# Altium PCB PCB1.PcbDoc
Units mm, origin at the board's own origin, x right, y up, seen from the top; angles counter-clockwise.
Board outline 70 x 25 mm, 2 copper layers (Top Layer, Bottom Layer); 58 components, 54 nets, 242 pads, 849 vias.
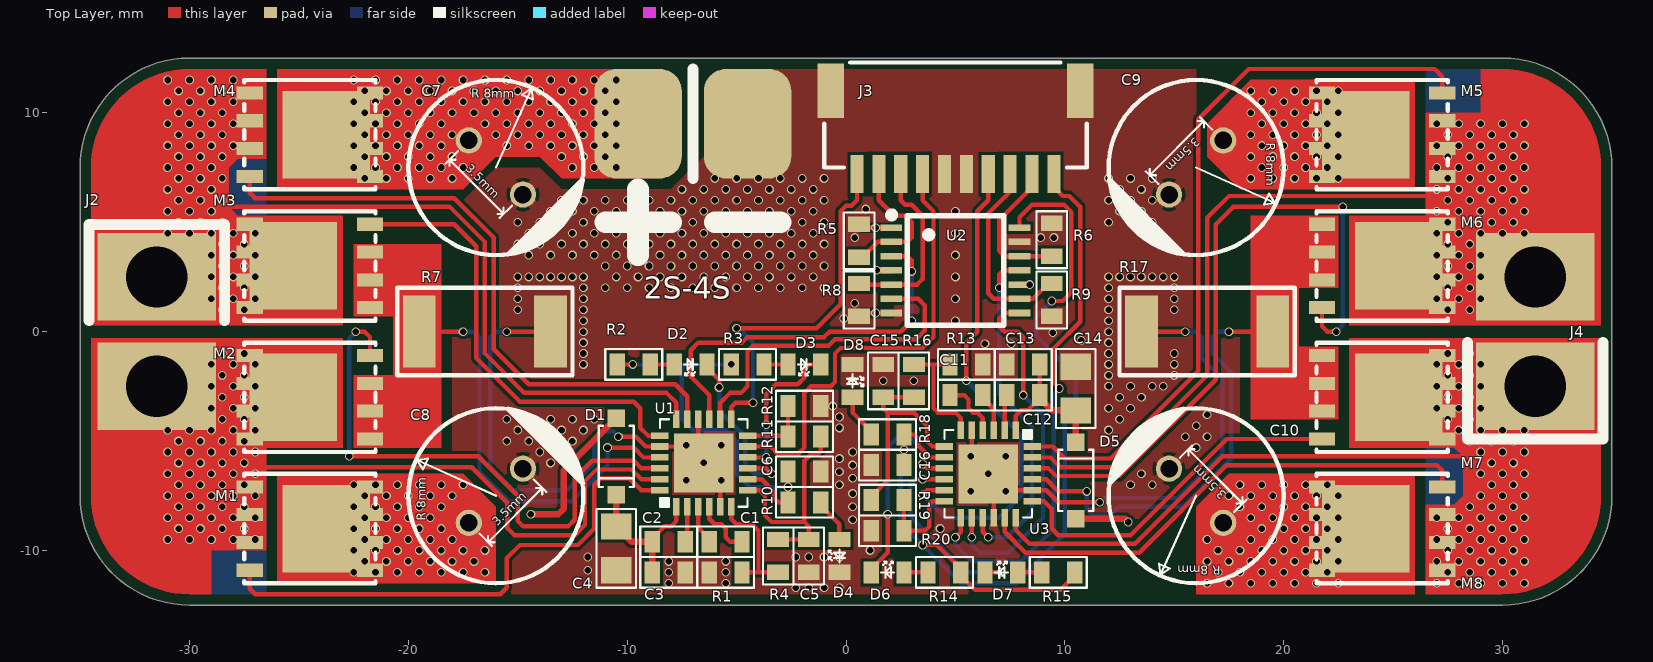
[diagram p0: Top Layer view]
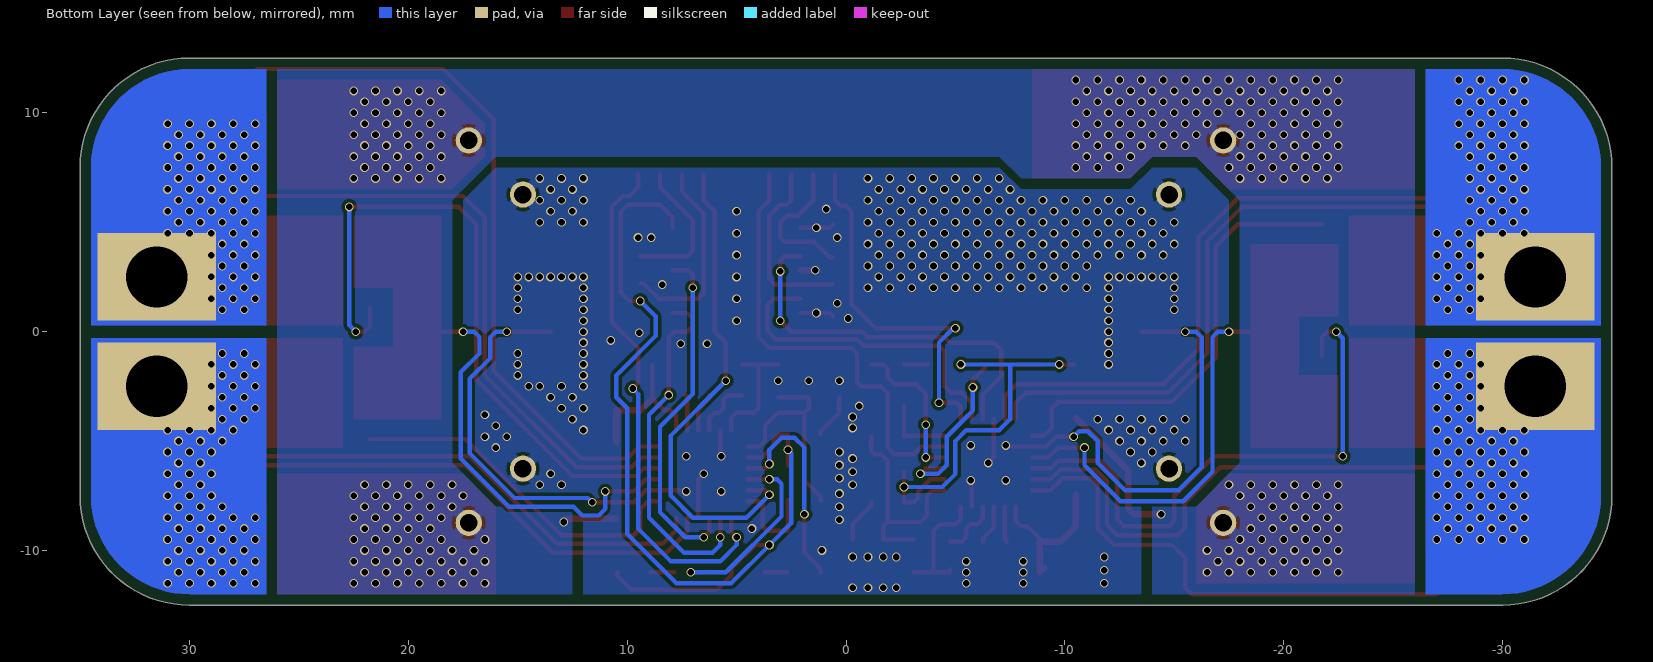
[diagram p1: Bottom Layer view, seen from below]
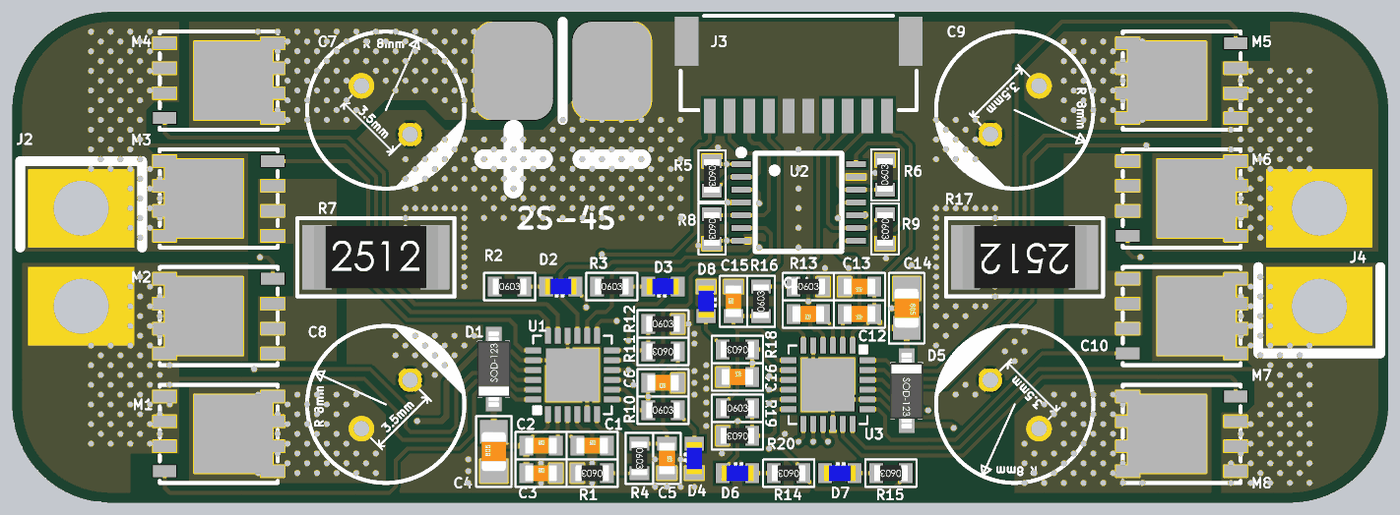
[diagram p2: 3D render of the assembled board from above, using the file's embedded part models]

## Layer stack, top to bottom
Top Solder: solder mask 0.0102, Solder Resist, Dk 3.5
Top Layer: signal copper 0.0356
Dielectric 1: dielectric 0.32, FR-4, Dk 4.8
Bottom Layer: signal copper 0.0356
Bottom Solder: solder mask 0.0102, Solder Resist, Dk 3.5

## Board outline
-30,-12.5 cw(c-30,-7.5) -35,-7.5 -35,7.5 cw(c-30,7.5) -30,12.5 30,12.5 cw(c30,7.5) 35,7.5 35,-7.5 cw(c30,-7.5) 30,-12.5

## Design rules (kind name [scope] priority, off if disabled: settings)
Clearance [All] p1: gap=0.15 ignorepadtopadclearanceinfootprint=FALSE
HoleSize [All] p1: absolutevalues=TRUE maxlimit=10 minlimit=0.025 maxpercent=80.000 minpercent=20.000
HoleToHoleClearance [All] p1: gap=0 allowstackedmicrovias=TRUE
MinimumSolderMaskSliver [All] p1: minsoldermaskwidth=0
PolygonConnect PolygonConnect_5 [All vs IsNamedPolygon('GND_TOP') Or IsNamedPolygon('GND_BOTTON') Or IsNamedPolygon('V_BAT_BOTTON')] p1: thpad.connectstyle=Relief thpad.reliefconductorwidth=0.5 thpad.reliefentries=4 thpad.polygonreliefangle="90 Angle" thpad.airgapwidth=0.15 smdpad.connectstyle=Direct smdpad.reliefconductorwidth=0.254 smdpad.reliefentries=4 smdpad.polygonreliefangle="90 Angle" smdpad.airgapwidth=0.254 via.connectstyle=Direct via.reliefconductorwidth=0.254 via.reliefentries=4 via.polygonreliefangle="90 Angle" via.airgapwidth=0.254
PolygonConnect PolygonConnect_4 [All vs IsNamedPolygon('GND_TOP')] p2: thpad.connectstyle=Relief thpad.reliefconductorwidth=0.5 thpad.reliefentries=4 thpad.polygonreliefangle="90 Angle" thpad.airgapwidth=0.15 smdpad.connectstyle=Relief smdpad.reliefconductorwidth=0.3 smdpad.reliefentries=4 smdpad.polygonreliefangle="90 Angle" smdpad.airgapwidth=0.15 via.connectstyle=Direct via.reliefconductorwidth=0.254 via.reliefentries=4 via.polygonreliefangle="90 Angle" via.airgapwidth=0.254
PolygonConnect PolygonConnect_3 [All vs IsNamedPolygon('GND_TOP')] p3: thpad.connectstyle=Relief thpad.reliefconductorwidth=0.5 thpad.reliefentries=4 thpad.polygonreliefangle="90 Angle" thpad.airgapwidth=0.15 smdpad.connectstyle=Relief smdpad.reliefconductorwidth=0.3 smdpad.reliefentries=4 smdpad.polygonreliefangle="90 Angle" smdpad.airgapwidth=0.15 via.connectstyle=NoConnect via.reliefconductorwidth=0.254 via.reliefentries=4 via.polygonreliefangle="90 Angle" via.airgapwidth=0.254
PolygonConnect PolygonConnect_2 [All vs IsNamedPolygon('GND_TOP') Or IsNamedPolygon('V_BAT_BOTTON')] p4: thpad.connectstyle=Relief thpad.reliefconductorwidth=0.5 thpad.reliefentries=4 thpad.polygonreliefangle="90 Angle" thpad.airgapwidth=0.15 smdpad.connectstyle=Direct smdpad.reliefconductorwidth=0.254 smdpad.reliefentries=4 smdpad.polygonreliefangle="90 Angle" smdpad.airgapwidth=0.254 via.connectstyle=Direct via.reliefconductorwidth=0.254 via.reliefentries=4 via.polygonreliefangle="90 Angle" via.airgapwidth=0.254
PolygonConnect PolygonConnect_1 [All vs IsNamedPolygon('V_BAT_BOTTON')] p5: thpad.connectstyle=Relief thpad.reliefconductorwidth=0.5 thpad.reliefentries=4 thpad.polygonreliefangle="90 Angle" thpad.airgapwidth=0.15 smdpad.connectstyle=Direct smdpad.reliefconductorwidth=0.254 smdpad.reliefentries=4 smdpad.polygonreliefangle="90 Angle" smdpad.airgapwidth=0.254 via.connectstyle=Direct via.reliefconductorwidth=0.254 via.reliefentries=4 via.polygonreliefangle="90 Angle" via.airgapwidth=0.254
PolygonConnect [All] p6: connectstyle=Relief reliefconductorwidth=0.254 reliefentries=4 polygonreliefangle="90 Angle" airgapwidth=0.254
RoutingVias [All] p1: holewidth=0.3 width=0.4 viastyle="Through Hole" minholewidth=0.3 minwidth=0.4 maxholewidth=0.3 maxwidth=0.4
SilkToSilkClearance [All] p1: silktosilkclearance=0
SilkToSolderMaskClearance [IsPad] p1: minsilkscreentomaskgap=0 clearancetoexposedcopper=TRUE
SolderMaskExpansion [IsVia] p1: expansion=0.102 istentingtop=TRUE
Width [All] p1: maxlimit=20 minlimit=0.1 preferedwidth=0.2
25 further rules are at their usual default settings.

## Components (designator, comment, footprint, x,y, rotation, side; value= is the part's Value field where it differs from the comment)
C1 "100nF" 0603C -5.5,-9.6 r0 top
C2 "1uF" 0603C -8.1,-9.6 r0 top
C3 "100nF" 0603C -8.1,-11 r0 top
C4 "10uF/25V" 0805C -10.5,-9.9 r90 top
C5 "1uF" 0603C -1.7,-10.25 r270 top
C6 "1uF" 0603C -1.9,-6.4 r180 top
C7 "CAP" CAP-8*11.5 -16,7.5 r315 top
C8 "CAP" CAP-8*11.5 -16,-7.5 r45 top
C9 "CAP" CAP-8*11.5 16,7.5 r225 top
C10 "CAP" CAP-8*11.5 16,-7.5 r135 top
C11 "100nF" 0603C 5.5,-2.9 r180 top
C12 "1uF" 0603C 8.1,-2.9 r180 top
C13 "100nF" 0603C 8.1,-1.5 r180 top
C14 "10uF/25V" 0805C 10.5,-2.6 r270 top
C15 "1uF" 0603C 1.7,-2.25 r90 top
C16 "1uF" 0603C 1.9,-6.1 r0 top
D1 "S4" SOD-123 -10.5,-5.7 r90 top
D2 "0603" 0603-LED -7.1,-1.5 r0 top
D3 "0603" 0603-LED -1.9,-1.5 r0 top
D4 "0603" 0603-LED -0.3,-10.25 r270 top
D5 "S4" SOD-123 10.5,-6.8 r270 top
D6 "0603" 0603-LED 1.9,-11 r180 top
D7 "0603" 0603-LED 7.1,-11 r180 top
D8 "0603" 0603-LED 0.3,-2.25 r90 top
J2 "XT30" AMASS_XT30_M -31.5,-2.5 r90 top
J3 "SH1.0_10P" SH1.0_10P 5,7.2 r180 top
J4 "XT30" AMASS_XT30_M 31.5,2.5 r270 top
M1 "MOS_IRFH7440" MOS_IRFH7440 -24.5,-9 r270 top
M2 "MOS_IRFH7440" MOS_IRFH7440 -24.5,-3 r90 top
M3 "MOS_IRFH7440" MOS_IRFH7440 -24.5,3 r90 top
M4 "MOS_IRFH7440" MOS_IRFH7440 -24.5,9 r270 top
M5 "MOS_IRFH7440" MOS_IRFH7440 24.5,9 r90 top
M6 "MOS_IRFH7440" MOS_IRFH7440 24.5,3 r270 top
M7 "MOS_IRFH7440" MOS_IRFH7440 24.5,-3 r270 top
M8 "MOS_IRFH7440" MOS_IRFH7440 24.5,-9 r90 top
R1 "0603" 0603R -5.5,-11 r180 top
R2 "10K" 0603R -9.7,-1.5 r0 top
R3 "10K" 0603R -4.5,-1.5 r0 top
R4 "0603" 0603R -3.1,-10.25 r270 top
R5 "10K" 0603R 0.6,4.15 r270 top
R6 "10K" 0603R 9.4,4.2 r90 top
R7 "10mR" 2512R -16.5,0 r0 top
R8 "10K" 0603R 0.6,1.45 r270 top
R9 "10K" 0603R 9.4,1.45 r270 top
R10 "10K" 0603R -1.9,-7.8 r0 top
R11 "0603" 0603R -1.9,-4.8 r180 top
R12 "0603" 0603R -1.9,-3.4 r0 top
R13 "0603" 0603R 5.5,-1.5 r0 top
R14 "10K" 0603R 4.5,-11 r180 top
R15 "10K" 0603R 9.7,-11 r180 top
R16 "0603" 0603R 3.1,-2.25 r90 top
R17 "10mR" 2512R 16.5,0 r180 top
R18 "10K" 0603R 1.9,-4.7 r180 top
R19 "0603" 0603R 1.9,-7.7 r0 top
R20 "0603" 0603R 1.9,-9.1 r180 top
U1 "DRV8701" DRV8701 -6.5,-6 r90 top
U2 "SN74HC125" TSSOP-14_L5.0-W4.4-P0.65-LS6.5-BL 5,2.8 r270 top
U3 "DRV8701" DRV8701 6.5,-6.5 r270 top

## Footprints (in the part's own frame and the unit in brackets; to place one, negate y for a bottom-side part, rotate by r counter-clockwise, add the part's x,y. Pads: shape width x height; smd on the part's side, far side on the other; paste and mask are expansions set on the pad)
0603-LED [mm]
  rect 0.7x1 smd mask+0.05: 1(-0.75,0) 2(0.75,0)
  silkscreen extent -0.3,-0.5 0.3,0.25, body extent -0.81,-0.4 0.81,0.4, height 1.1
0603C [mm]
  rect 0.7x1 smd mask+0.05: 1(-0.75,0) 2(0.75,0)
  silkscreen extent -1.3,-0.7 1.3,0.7, body extent -0.8,-0.4 0.8,0.4, height 0.3
0603R [mm]
  rect 0.7x1 smd mask+0.05: 1(-0.75,0) 2(0.75,0)
  silkscreen extent -1.3,-0.7 1.3,0.7, body extent -0.85,-0.4 0.85,0.4, height 0.56
0805C [mm]
  rect 1.2x1.4 smd mask+0.051: 1(-1,0) 2(1,0)
  silkscreen extent -1.8,-0.9 1.8,0.9, body extent -1,-0.63 1,0.63, height 0.78
2512R [mm]
  rect 1.5x3.3 smd: 1(-3,0) 2(3,0)
  silkscreen extent -4,-2 4,2, body extent -3.16,-1.6 3.16,1.6, height 0.62
AMASS_XT30_M [mm]
  rect 4x5.4 hole 2.8: 1(5,0) 2(0,0)
  silkscreen extent 3,-3.1 7.4,3.1
CAP-8*11.5 [mm]
  round 1.2 hole 0.8 paste+0 mask+0.051: 1(-1.75,0) 2(1.75,0)
  silkscreen extent -4,-4 4.1,4
DRV8701 [mm]
  rect 0.8x0.3 smd mask+0.05: 1(-2,1.25) 2(-2,0.75) 3(-2,0.25) 4(-2,-0.25) 5(-2,-0.75) 6(-2,-1.25) 13(2,-1.25) 14(2,-0.75) 15(2,-0.25) 16(2,0.25) 17(2,0.75) 18(2,1.25)
  rect 0.3x0.8 smd mask+0.05: 7(-1.25,-2) 8(-0.75,-2) 9(-0.25,-2) 10(0.25,-2) 11(0.75,-2) 12(1.25,-2) 19(1.25,2) 20(0.75,2) 21(0.25,2) 22(-0.25,2) 23(-0.75,2) 24(-1.25,2)
  rect 2.7x2.7 smd mask+0.05: 25(0,0)
  silkscreen extent -2,-2 2,2
MOS_IRFH7440 [mm]
  rect 0.6x1.2 smd paste+0 mask+0.051: D(-1.905,2.75) D(-0.635,2.75) D(0.635,2.75) D(1.905,2.75) G(1.905,-2.75) S(-1.905,-2.75) S(-0.635,-2.75) S(0.635,-2.75)
  rect 4x4 smd paste+0 mask+0.051: D(0,0.75)
  silkscreen extent -2.5,-3 2.5,3
SH1.0_10P [mm]
  rect 0.6x1.75 smd: 1(-4.5,0) 2(-3.5,0) 3(-2.497,0) 4(-1.5,0) 5(-0.5,0) 6(0.5,0) 7(1.5,0) 8(2.5,0) 9(3.5,0) 10(4.5,0)
  rect 1.2x2.5 smd: 11(5.7,-3.81) 12(-5.7,-3.81)
  silkscreen extent -6,-5.1 6,-0.3
SOD-123 [mm] "塑封二极管（电磁板的）"
  rect 0.8x0.8 smd: A(1.75,0) K(-1.75,0)
  silkscreen extent -1.4,-0.8 1.4,0.8, body extent -1.93,-0.85 1.92,0.85, height 1.43
TSSOP-14_L5.0-W4.4-P0.65-LS6.5-BL [mil]
  rect 12x39 smd mask+1.97: 1(-76.8,-115.2) 2(-51.2,-115.2) 3(-25.6,-115.2) 4(0,-115.2) 5(25.6,-115.2) 6(51.2,-115.2) 7(76.8,-115.2) 8(76.8,115.2) 9(51.2,115.2) 10(25.6,115.2) 11(0,115.2) 12(-25.6,115.2) 13(-51.2,115.2) 14(-76.8,115.2)
  silkscreen extent -106,-121 98,87

## Part data
C1 C2 C3 C5 C6 C11 C12 C13 C15 C16: library part 0603-C
C4 C14: library part 0805-C
C7 C8 C9 C10: "插件电解电容"
D1 D5: library part DIODE-SOD123, "二极管"
D2 D3 D4 D6 D7 D8: library part 0603-LED, Designer=www.dratk.com
J2 J4: library part AMASS_XT30_M, "XT30_M"
M1 M2 M3 M4 M5 M6 M7 M8: "NMOS"
R1 R2 R3 R4 R5 R6 R8 R9 R10 R11 R12 R13 R14 R15 R16 R18 R19 R20: library part 0603-R
R7 R17: library part 2512-R
U2: "TI, 2-6V"

## Free pads (board coordinates)
  rrect50% 4x5 smd paste+0 mask+0.051: 0(-9.5,9.5) 0(-4.5,9.5)

## Via types
v1: diameter 0.4, hole 0.3, Top Layer to Bottom Layer, 849 vias

## Nets (pads, with @x,y where several pads share a name; then routed paths per layer and width w, separated by ;. In a path a pad name is that pad's centre, name@x,y a point inside that pad or via, vN(x,y) a via of type N, cw(c..) or ccw(c..) an arc to the next point about the centre after c; other vN are vias at no path point)
DVDD: C16.2 R14.1 R15.1 R18.1 U2.14 U3.8 | length 45.1
  Top Layer w0.2: C16.2 v1(2.65,-5.4) R18.1 3.1,-4.7 3.3,-4.9 3.3,-5.2 3.85,-5.75 U3.8 ; v1(3.5,-9.75) 4.15,-9.75 5.25,-10.85 R14.1 5.25,-11.15 5.9,-11.8 9.8,-11.8 10.45,-11.15 R15.1 ; U2.14 7.926,5.226 8.5,5.8 9.962,5.8 10.3,5.462 10.3,1.8 9.9,1.4 v1(9.4,1.4)
  Bottom Layer w0.2: v1(2.65,-5.4) 2.5,-5.55 2.5,-8.75 v1(3.5,-9.75) 5.25,-11.5 7.75,-11.5 10,-9.25 10,-3.5 10.5,-3 10.5,-2 8.7,-0.2 8.7,0.7 v1(9.4,1.4)
EN/IN2: U1.14 U2.6 | length 15.2
  Top Layer w0.2: U1.14 -5.75,-3.25 -5.3,-2.8 -4.8,-2.8 -4.5,-2.5 -4.5,-0.9 -4.25,-0.65 -0.8,-0.65 -0.5,-0.35 3.2,-0.35 3.6,0.05 3.6,1.2 3.3,1.5 2.8,1.5 U2.6
GND: C3.2 C4.1 C5.2 C6.1 C7.2 C8.2 C9.2 C10.2 C13.2 C14.1 C15.2 C16.1 D4.2 D8.2 J3.5 J3.6 J3.11 J3.12 pad.0@-4.5,9.5 R1.2 R5.1 R6.2 R7.2 R8.2 R9.2 R12.2 R13.2 R17.2 R20.2 U1.5 U1.16 U1.20 U1.25 U2.1 U2.4 U2.7 U2.10 U2.13 U3.5 U3.16 U3.20 U3.25 | length 50.2
  Top Layer w0.2: v1(-15.5,0) -13.502,0 -13.501,0.001 R7.2 ; v1(-10.4,-4.8) -9.6,-4.8 -9.15,-5.25 U1.20 -7.35,-5.25 v1(-7.3,-5.2) ; U1.16 -6.75,-5.75 v1(-6.5,-6) ; U1.5 -5.75,-6.85 v1(-5.7,-6.8) ; R8.2 0.75,0.85 v1(1.35,0.85) ; R5.1 0.75,4.75 v1(1.35,4.75) ; v1@1.351,0.849 U2.7 ; v1(1.35,4.75) U2.1 ; v1(5.7,-5.7) 5.75,-5.65 U3.5 ; v1(6.5,-6.5) 6.75,-6.75 U3.16 ; v1(7.3,-7.3) 7.35,-7.25 U3.20 9.15,-7.25 9.7,-7.8 v1(11.6,-7.8) ; R17.2 v1(15.5,0)
  Top Layer w0.3: v1(1.4,2.8) U2.4
  Bottom Layer w0.2: v1(-15.5,0) -16,0 -16.25,-0.25 -16.25,-6.2 -15.2,-7.25 -12.75,-7.25 -11.5,-6 -11.5,-5 -11.05,-4.55 -10.65,-4.55 v1(-10.4,-4.8) ; v1(11.6,-7.8) 11.8,-7.6 15.15,-7.6 17.2,-5.55 17.2,-2.15 16.25,-1.2 16.25,-0.25 16,0 v1(15.5,0)
  other v1: -2.3,-11.7 -1.7,-11.7 -1,-11.7 -0.3,-11.7 -11.8,-11.5 -8.1,-11.5 -5.5,-11.5 -8.1,-11 -5.5,-11 -11.8,-10.9 -8.1,-10.5 -5.5,-10.5 -11.8,-10.3 -2.3,-10.3 -1.7,-10.3 -1,-10.3 -0.3,-10.3 1.1,-10 4.3,-9 0.3,-8.6 0.3,-8 0.3,-7.4 5.7,-7.3 -0.3,-7 13,-7 14,-7 -7.3,-6.8 0.3,-6.7 13.5,-6.5 -0.3,-6.4 0.3,-6.1 -13.5,-6 -0.3,-5.8 7.3,-5.7 -14,-5.5 -13,-5.5 0.3,-5.5 16,-5.3 -5.7,-5.2 -15.5,-5 -14.5,-5 -13.5,-5 -12.5,-5 15.5,-4.8 16.5,-4.8 -15,-4.5 -14,-4.5 -13,-4.5 -12,-4.5 12,-4.5 -0.3,-4.4 16,-4.3 -15.5,-4 -14.5,-4 -13.5,-4 -12.5,-4 -11.5,-4 12.5,-4 -0.3,-3.9 16.5,-3.8 12,-3.5 13,-3.5 -0.6,-3.4 12.5,-3 13.5,-3 12,-2.5 13,-2.5 14,-2.5 14.5,-2.5 0.3,-2.25 1.7,-2.25 3.1,-2.25 12,-2 15,-2 -12,-1.5 12,-1.5 15,-1.5 -12,-1 12,-1 15,-1 6.35,-0.55 7.55,-0.55 -12,-0.5 12,-0.5 10.75,-0.4 9.45,-0.05 -12,0 12,0 -12,0.5 5,0.5 12,0.5 -0.1,0.6 -15,1 -12,1 12,1 15,1 0.4,1.3 -15,1.5 -12,1.5 5,1.5 12,1.5 15,1.5 -15,2 -12,2 -11,2 -10,2 -9,2 -8,2 -7,2 -6,2 -5,2 -4,2 -3,2 -2,2 -1,2 12,2 15,2 8.4,2.15 -15,2.5 -14.5,2.5 -14,2.5 -13.5,2.5 -13,2.5 -12.5,2.5 -12,2.5 -10.5,2.5 -9.5,2.5 -8.5,2.5 -7.5,2.5 -6.5,2.5 -5.5,2.5 -4.5,2.5 -3.5,2.5 -2.5,2.5 -1.5,2.5 5,2.5 12,2.5 12.5,2.5 13,2.5 13.5,2.5 14,2.5 14.5,2.5 15,2.5 -11,3 -10,3 -9,3 -8,3 -7,3 -6,3 -5,3 -4,3 -3,3 -2,3 -1,3 -14.5,3.5 -13.5,3.5 -12.5,3.5 -11.5,3.5 -10.5,3.5 -9.5,3.5 -8.5,3.5 -7.5,3.5 -6.5,3.5 -5.5,3.5 -4.5,3.5 -3.5,3.5 -2.5,3.5 -1.5,3.5 5,3.5 -15,4 -14,4 -13,4 -12,4 -11,4 -10,4 -9,4 -8,4 -7,4 -6,4 -5,4 -4,4 -3,4 -2,4 -1,4 0.4,4.3 8.9,4.3 9.5,4.3 -14.5,4.5 -13.5,4.5 -12.5,4.5 -11.5,4.5 -10.5,4.5 -9.5,4.5 -8.5,4.5 -7.5,4.5 -6.5,4.5 -5.5,4.5 -4.5,4.5 -3.5,4.5 -2.5,4.5 -1.5,4.5 5,4.5 -15,5 -14,5 -13,5 -12,5 -11,5 -10,5 -9,5 -8,5 -7,5 -6,5 -5,5 -4,5 -3,5 -2,5 -1,5 12,5 13,5 14,5 -13.5,5.5 -12.5,5.5 -11.5,5.5 -10.5,5.5 -9.5,5.5 -8.5,5.5 -7.5,5.5 -6.5,5.5 -5.5,5.5 -4.5,5.5 -3.5,5.5 -2.5,5.5 -1.5,5.5 5,5.5 12.5,5.5 13.5,5.5 0.9,5.6 -13,6 -12,6 -11,6 -10,6 -9,6 -8,6 -7,6 -6,6 -5,6 -4,6 -3,6 -2,6 -1,6 12,6 13,6 14,6 -7.5,6.5 -6.5,6.5 -5.5,6.5 -4.5,6.5 -3.5,6.5 -2.5,6.5 -1.5,6.5 12.5,6.5 13.5,6.5 -7,7 -6,7 -5,7 -4,7 -3,7 -2,7 -1,7 12,7 13,7 14,7
M2_EN/IN2: U2.8 U3.14 | length 16.6
  Top Layer w0.2: v1(5.75,-9.4) U3.14 ; U2.8 7.249,0.849 7,0.6 7,0.25 7.25,0 7.85,0 8.1,-0.25 v1(8.1,-2.9)
  Bottom Layer w0.2: v1(5.75,-9.4) 5.75,-9.75 6.1,-10.1 7.4,-10.1 9,-8.5 9,-3.8 v1(8.1,-2.9)
M2_nFAULT: D6.2 U3.9 | length 9.8
  Top Layer w0.2: D6.2 1.15,-10.85 1.9,-10.1 v1(1.9,-8.35) ; v1(3.5,-6.05) 3.7,-6.25 U3.9
  Bottom Layer w0.2: v1(1.9,-8.35) 1.9,-5.3 2.35,-4.85 2.95,-4.85 3.5,-5.4 v1(3.5,-6.05)
M2_nSLEEP: J3.1 U3.13 | length 24.4
  Top Layer w0.2: v1(5,-9.4) 5.25,-9.15 U3.13 ; J3.1 9.5,6.6 9.9,6.2 10.2,6.2 10.7,5.7 10.7,0.45 9.5,-0.75 9.5,-2.35 v1(9.75,-2.6)
  Bottom Layer w0.2: v1(5,-9.4) 5,-9.75 5.75,-10.5 8,-10.5 9.5,-9 9.5,-2.85 v1(9.75,-2.6)
M2_PH/IN1: U2.11 U3.15 | length 16
  Top Layer w0.2: U3.15 6.25,-9.15 v1(6.5,-9.4) ; v1(7,2) 7,2.6 7.2,2.8 U2.11
  Bottom Layer w0.2: v1(6.5,-9.4) 7.35,-9.4 8.5,-8.25 8.5,-4.35 7,-2.85 v1(7,2)
M2_SNSOUT: D7.2 U3.10 | length 9.1
  Top Layer w0.2: v1(3.5,-6.75) U3.10 ; D7.2 v1(7.1,-11)
  Bottom Layer w0.2: v1(3.5,-6.75) 3.15,-6.75 2.95,-6.95 2.95,-8.45 5.5,-11 v1(7.1,-11)
M2_SO: J3.4 U3.11 | length 22.6
  Top Layer w0.2: v1(3.5,-7.45) 3.7,-7.25 U3.11 ; v1(5.5,-2.25) 5.5,-0.5 6,0 6,5.5 6.5,6 J3.4
  Bottom Layer w0.2: v1(3.5,-7.45) 4.55,-8.5 7,-8.5 8,-7.5 8,-4.75 v1(5.5,-2.25)
NetC1_1: C1.1 U1.3 | length 1.8
  Top Layer w0.2: U1.3 -6.75,-8.95 -6.25,-9.45 C1.1
NetC1_2: C1.2 U1.4 | length 2.7
  Top Layer w0.2: U1.4 -6.25,-8.55 -6,-8.8 -5.7,-8.8 -5.5,-9 -5.5,-9.4 -5.3,-9.6 C1.2
NetC2_1: C2.1 C3.1 C4.2 D1.K U1.1 | length 7.3
  Top Layer w0.2: C2.1 -8.85,-9.45 -8.3,-8.9 -8,-8.9 -7.75,-8.65 U1.1
  Top Layer w0.3: D1.K C4.2 -9.8,-9.6 C2.1 C3.1 C3.1@-9.05,-10.8
NetC2_2: C2.2 U1.2 | length 1.6
  Top Layer w0.2: C2.2 -7.25,-9.5 U1.2
NetC5_1: C5.1 R4.1 R11.1 U1.7 | length 10.4
  Top Layer w0.2: U1.7 -3.95,-7.25 -3.7,-7.5 -3.7,-8.4 -3.4,-8.7 -1.9,-8.7 ; R4.1 C5.1 -1.7,-8.9 -1.9,-8.7 ; R11.1 -1.15,-5.15 -1.15,-5.45 -1.3,-5.6 -1.6,-5.6 -1.9,-5.9 -1.9,-8.7
NetC6_2: C6.2 R2.1 R3.1 R10.1 U1.8 | length 18.7
  Top Layer w0.2: R2.1 v1(-9.75,-1.5) ; v1(-5.25,-1.5) R3.1@-5.25,-1.35 ; U1.8 -3.85,-6.75 -3.3,-7.3 -3.3,-7.6 -3.1,-7.8 R10.1 v1(-2.65,-7.1) C6.2
  Bottom Layer w0.2: v1(-9.75,-1.5) -7.5,-1.5 ; v1(-5.25,-1.5) -7.5,-1.5 ; v1(-2.65,-7.1) -4.4,-7.1 -5,-6.5 -5,-5 -5.5,-4.5 -7,-4.5 -7.5,-4 -7.5,-1.5
NetC11_1: C11.1 U3.3 | length 1.8
  Top Layer w0.2: C11.1 6.25,-3.05 6.75,-3.55 U3.3
NetC11_2: C11.2 U3.4 | length 2.7
  Top Layer w0.2: C11.2 5.4,-2.9 5.6,-3.1 5.6,-3.5 5.8,-3.7 6,-3.7 6.25,-3.95 U3.4
NetC12_1: C12.1 C13.1 C14.2 D5.K U3.1 | length 7.1
  Top Layer w0.2: U3.1 7.75,-3.85 8,-3.6 8.3,-3.6 C12.1@8.85,-3.05 ; C12.1 C12.1@8.85,-3.05 ; C13.1 C12.1@8.85,-3.05
  Top Layer w0.3: C12.1@8.85,-3.05 9.4,-3.6 C14.2 D5.K
NetC12_2: C12.2 U3.2 | length 1.6
  Top Layer w0.2: U3.2 7.25,-3 C12.2
NetC15_1: C15.1 R16.1 R19.1 U3.7 | length 10.1
  Top Layer w0.2: R19.1 1.15,-7.55 1.9,-6.8 1.9,-3.7 ; R16.1 C15.1 1.7,-3.5 1.9,-3.7 ; U3.7 3.95,-5.25 3.7,-5 3.7,-4.3 3.1,-3.7 1.9,-3.7
NetD2_1: D2.1 R2.2 | length 1.1
  Top Layer w0.2: R2.2 D2.1
NetD3_1: D3.1 R3.2 | length 1.1
  Top Layer w0.2: R3.2 D3.1
NetD4_1: D4.1 R10.2 | length 2.1
  Top Layer w0.2: R10.2 -1.15,-7.95 -0.3,-8.8 D4.1
NetD6_1: D6.1 R14.2 | length 1.1
  Top Layer w0.2: D6.1 R14.2
NetD7_1: D7.1 R15.2 | length 1.1
  Top Layer w0.2: D7.1 R15.2
NetD8_1: D8.1 R18.2 | length 2.1
  Top Layer w0.2: D8.1 0.3,-3.7 1.15,-4.55 R18.2
NetJ2_1: J2.1 M3.D M4.S U1.18 | length 28.2
  Top Layer w0.2: -28.5,5.7 -18.1,5.7 -16.5,4.1 -16.5,-1 -14.7,-2.8 -8.2,-2.8 -7.75,-3.25 U1.18
  other v1: -28.5,1 -27.5,1 -29,1.5 -28,1.5 -27,1.5 -28.5,2 -27.5,2 -29,2.5 -28,2.5 -27,2.5 -28.5,3 -27.5,3 -29,3.5 -28,3.5 -27,3.5 -28.5,4 -27.5,4 -31,4.5 -30,4.5 -29,4.5 -28,4.5 -27,4.5 -30.5,5 -29.5,5 -28.5,5 -31,5.5 -30,5.5 -29,5.5 -30.5,6 -29.5,6 -28.5,6 -31,6.5 -30,6.5 -29,6.5 -30.5,7 -29.5,7 -28.5,7 -31,7.5 -30,7.5 -29,7.5 -30.5,8 -29.5,8 -28.5,8 -31,8.5 -30,8.5 -29,8.5 -28,8.5 -30.5,9 -29.5,9 -28.5,9 -31,9.5 -30,9.5 -29,9.5 -28,9.5 -30.5,10 -29.5,10 -28.5,10 -31,10.5 -30,10.5 -29,10.5 -28,10.5 -30.5,11 -29.5,11 -28.5,11 -31,11.5 -30,11.5 -29,11.5 -28,11.5
NetJ2_2: J2.2 M1.S M2.D U1.23 | length 22.8
  Top Layer w0.2: -26.7,-6.2 -17.1,-6.2 -15.475,-7.825 -15.475,-8.975 -15.15,-9.3 -12.4,-9.3 -11.925,-8.825 -11.925,-6.825 -11.4,-6.3 -9.8,-6.3 -9.35,-6.75 U1.23
  other v1: -31,-9.5 -30,-9.5 -29,-9.5 -28,-9.5 -27,-9.5 -30.5,-9 -29.5,-9 -28.5,-9 -27.5,-9 -31,-8.5 -30,-8.5 -29,-8.5 -28,-8.5 -27,-8.5 -30.5,-8 -29.5,-8 -28.5,-8 -27.5,-8 -31,-7.5 -30,-7.5 -29,-7.5 -28,-7.5 -27,-7.5 -30.5,-7 -29.5,-7 -28.5,-7 -27.5,-7 -31,-6.5 -30,-6.5 -29,-6.5 -28,-6.5 -27,-6.5 -30.5,-6 -29.5,-6 -28.5,-6 -27.5,-6 -31,-5.5 -30,-5.5 -29,-5.5 -28,-5.5 -27,-5.5 -30.5,-5 -29.5,-5 -28.5,-5 -27.5,-5 -31,-4.5 -30,-4.5 -29,-4.5 -28,-4.5 -27,-4.5 -28.5,-4 -27.5,-4 -29,-3.5 -28,-3.5 -27,-3.5 -28.5,-3 -27.5,-3 -29,-2.5 -28,-2.5 -27,-2.5 -28.5,-2 -27.5,-2 -29,-1.5 -28,-1.5 -27,-1.5 -28.5,-1 -27.5,-1
NetJ4_1: J4.1 M7.D M8.S U3.18 | length 23.1
  Top Layer w0.2: U3.18 7.75,-9.05 8.4,-9.7 13.2,-9.7 17.2,-5.7 28.375,-5.7
  other v1: 27,-11.5 28,-11.5 29,-11.5 30,-11.5 31,-11.5 27.5,-11 28.5,-11 29.5,-11 30.5,-11 27,-10.5 28,-10.5 29,-10.5 30,-10.5 31,-10.5 27.5,-10 28.5,-10 29.5,-10 30.5,-10 27,-9.5 28,-9.5 29,-9.5 30,-9.5 31,-9.5 27.5,-9 28.5,-9 29.5,-9 30.5,-9 27,-8.5 28,-8.5 29,-8.5 30,-8.5 31,-8.5 28.5,-8 29.5,-8 30.5,-8 29,-7.5 30,-7.5 31,-7.5 29.5,-7 30.5,-7 29,-6.5 30,-6.5 31,-6.5 29.5,-6 30.5,-6 29,-5.5 30,-5.5 31,-5.5 28.5,-5 29.5,-5 30.5,-5 28,-4.5 29,-4.5 30,-4.5 31,-4.5 27.5,-4 28.5,-4 27,-3.5 28,-3.5 29,-3.5 27.5,-3 28.5,-3 27,-2.5 28,-2.5 29,-2.5 27.5,-2 28.5,-2 27,-1.5 28,-1.5 29,-1.5 27.5,-1 28.5,-1
NetJ4_2: J4.2 M5.S M6.D U3.23 | length 27.7
  Top Layer w0.2: U3.23 9.35,-5.75 9.8,-6.2 12.3,-6.2 16.5,-2 16.5,0.866 16.5,5.2 17.5,6.2 26.635,6.2
  other v1: 27.5,1 28.5,1 27,1.5 28,1.5 29,1.5 27.5,2 28.5,2 27,2.5 28,2.5 29,2.5 27.5,3 28.5,3 27,3.5 28,3.5 29,3.5 27.5,4 28.5,4 27,4.5 28,4.5 29,4.5 30,4.5 31,4.5 27.5,5 28.5,5 29.5,5 30.5,5 27,5.5 28,5.5 29,5.5 30,5.5 31,5.5 27.5,6 28.5,6 29.5,6 30.5,6 27,6.5 28,6.5 29,6.5 30,6.5 31,6.5 27.5,7 28.5,7 29.5,7 30.5,7 27,7.5 28,7.5 29,7.5 30,7.5 31,7.5 27.5,8 28.5,8 29.5,8 30.5,8 27,8.5 28,8.5 29,8.5 30,8.5 31,8.5 27.5,9 28.5,9 29.5,9 30.5,9 27,9.5 28,9.5 29,9.5 30,9.5 31,9.5
NetM1_G: M1.G U1.24 | length 24.1
  Top Layer w0.2: M1.G -27.25,-11.75 -27,-12 -15.8,-12 -15.5,-11.7 -15.5,-10.35 -14.9,-9.75 -12.25,-9.75 -11.5,-9 -11.5,-7 -11.2,-6.7 -9.9,-6.7 -9.35,-7.25 U1.24
NetM2_G: M2.G U1.22 | length 26.1
  Top Layer w0.2: v1(-22.7,-5.7) -16.8,-5.7 -15,-7.5 -15,-8.65 -14.75,-8.9 -12.7,-8.9 -12.4,-8.6 -12.4,-6.7 -11.6,-5.9 -9.7,-5.9 -9.35,-6.25 U1.22 ; v1(-22.4,0) -22,0 -21.75,-0.25 M2.G
  Bottom Layer w0.2: v1(-22.7,-5.7) -22.7,-0.3 v1(-22.4,0)
NetM2_S: M2.S M3.S R7.1 U1.21 | length 19.5
  Top Layer w0.2: R7.1 v1(-17.5,0) ; v1(-10.9,-5.3) -9.7,-5.3 -9.25,-5.75 U1.21
  Bottom Layer w0.2: v1(-17.5,0) -17,0 -16.75,-0.25 -16.75,-6.407 -15.407,-7.75 -12.543,-7.75 -10.9,-6.107 v1(-10.9,-5.3)
NetM3_G: M3.G U1.19 | length 20.8
  Top Layer w0.2: M3.G -17.905,4.905 -16.9,3.9 -16.9,-1.2 -14.9,-3.2 -10.9,-3.2 -9.7,-3.2 -9.4,-3.5 -9.4,-4.4 -9.05,-4.75 U1.19
NetM4_G: M4.G U1.17 | length 28.6
  Top Layer w0.2: M4.G -27.25,6.35 -27,6.1 -17.9,6.1 -16.1,4.3 -16.1,-0.8 -14.5,-2.4 -7.8,-2.4 -7.25,-2.95 U1.17
NetM5_G: M5.G U3.24 | length 34
  Top Layer w0.2: U3.24 9.45,-5.25 10,-5.8 12.1,-5.8 16.1,-1.8 16.1,1.031 16.1,7.9 16.1,9.7 18.4,12 26.9,12 27.25,11.65 M5.G
NetM6_G: M6.G U3.22 | length 31
  Top Layer w0.2: U3.22 9.25,-6.25 9.6,-6.6 12.5,-6.6 16.9,-2.2 16.9,0.7 16.9,4.9 17.7,5.7 v1(22.7,5.7) ; M6.G 21.75,0.25 22,0 v1(22.4,0)
  Bottom Layer w0.2: v1(22.4,0) 22.7,0.3 v1(22.7,5.7)
NetM6_S: M6.S M7.S R17.1 U3.21 | length 20.1
  Top Layer w0.2: U3.21 9.15,-6.75 9.7,-7.3 v1(11,-7.3) ; v1(17.5,0) R17.1
  Bottom Layer w0.2: v1(11,-7.3) 11,-8.1 11.3,-8.4 12.05,-8.4 12.45,-8 15.4,-8 17.6,-5.8 17.6,-1.85 16.75,-1 16.75,-0.25 17,0 v1(17.5,0)
NetM7_G: M7.G U3.19 | length 16.2
  Top Layer w0.2: U3.19 9.05,-7.75 9.4,-8.1 9.4,-9 9.7,-9.3 13,-9.3 17.395,-4.905 M7.G
NetM8_G: M8.G U3.17 | length 23.5
  Top Layer w0.2: U3.17 7.25,-9.15 8.2,-10.1 13.4,-10.1 17.4,-6.1 27,-6.1 27.25,-6.35 M8.G
NetR1_1: R1.1 R4.2 U1.6 | length 5.7
  Top Layer w0.2: U1.6 -5.25,-8.55 -5,-8.8 -4.3,-8.8 -4,-9.1 -4,-11 ; R1.1@-4.75,-10.85 R1.1 -4,-11 ; R4.2 -4,-11
NetR11_2: R11.2 R12.1 U1.12 | length 3.3
  Top Layer w0.2: U1.12 -2.7,-4.75 R11.2 R12.1
NetR13_1: R13.1 R16.2 U3.6 | length 5.6
  Top Layer w0.2: R16.2 4,-1.5 ; R13.1 4,-1.5 ; U3.6 5.25,-3.95 5,-3.7 4.2,-3.7 4,-3.5 4,-1.5
NetR19_2: R19.2 R20.1 U3.12 | length 4.4
  Top Layer w0.2: R19.2 R20.1 3.6,-9.1 3.8,-8.9 3.8,-7.9 3.95,-7.75 U3.12
nFAULT: D2.2 U1.9 | length 7.9
  Top Layer w0.2: D2.2 -6.35,-1.65 -5.8,-2.2 v1(-5.8,-2.55) ; U1.9 -3.65,-6.25 v1(-3.4,-6.5)
  Bottom Layer w0.2: v1(-5.8,-2.55) -5.8,-3.6 -5.4,-4 -4.6,-4.8 -4.6,-6.1 -4.2,-6.5 v1(-3.4,-6.5)
nSLEEP: J3.10 U1.13 | length 17
  Top Layer w0.2: U1.13 -5.25,-3.45 -5.05,-3.25 v1(-4.25,-3.25) ; v1(-5,0.15) -1.35,0.15 -0.25,1.25 -0.25,5.5 0,5.75 0.25,5.75 0.5,6 J3.10
  Bottom Layer w0.2: v1(-5,0.15) -4.9,0.15 -4.25,-0.5 v1(-4.25,-3.25)
PH/IN1: U1.15 U2.3 | length 17.9
  Top Layer w0.2: U1.15 -6.25,-2.9 -7.1,-2.05 -7.1,-0.85 -6.75,-0.5 -4.75,-0.5 -4.5,-0.25 -1,-0.25 -0.75,0 2.5,0 v1(3,0.5) ; U2.3 2.8,3.45 3,3.25 v1(3,2.75)
  Bottom Layer w0.2: v1(3,0.5) v1(3,2.75)
PWM1: J3.8 R8.1 U2.5 | length 8.4
  Top Layer w0.2: R8.1 0.65,2.15 U2.5 3.25,2.15 3.5,2.4 3.5,5.3 3,5.8 2.7,5.8 2.5,6 J3.8
PWM2: J3.9 R5.2 U2.2 | length 6.6
  Top Layer w0.2: R5.2 0.75,3.4 1.45,4.1 U2.2 2.8,4.1 3,4.3 3,5 2.7,5.3 2.2,5.3 1.5,6 J3.9
PWM3: J3.3 R9.1 U2.9 | length 9.2
  Top Layer w0.2: J3.3 7.497,6.397 6.5,5.4 6.5,1.75 6.75,1.5 U2.9 8.55,1.5 9.25,2.2 R9.1
PWM4: J3.2 R6.1 U2.12 | length 6.6
  Top Layer w0.2: J3.2 8.5,6.6 7.2,5.3 7,5.1 7,3.7 7.25,3.45 U2.12 R6.1
SNSOUT: D3.2 U1.10 | length 7
  Top Layer w0.2: U1.10 v1(-3.65,-5.75) ; v1(-3.65,-4.25) -3.65,-2.85 -3.2,-2.4 -2.2,-2.4 -1.9,-2.1 -1.9,-1.7 -1.7,-1.5 D3.2
  Bottom Layer w0.2: v1(-3.65,-5.75) v1(-3.65,-4.25)
SO: J3.7 U1.11 | length 20.7
  Top Layer w0.2: U1.11 -3.45,-5.25 -3.1,-5.6 -2.2,-5.6 -1.9,-5.3 -1.9,-2.8 -1.6,-2.5 -0.7,-2.5 -0.5,-2.3 -0.5,-1 -0.25,-0.75 3.5,-0.75 4,-0.25 4,5.5 3.5,6 J3.7
V_BAT: C7.1 C8.1 C9.1 C10.1 D1.A D5.A M1.D M4.D M5.D M8.D pad.0@-9.5,9.5 | length 9.2
  Top Layer w0.3: v1(-14.4,-8.35) -13.15,-8.35 -12.9,-8.1 -12.9,-6.35 D1.A ; D5.A 12.75,-8.55 v1(12.9,-8.7)
  other v1: 16.5,-11.5 17.5,-11.5 18.5,-11.5 19.5,-11.5 20.5,-11.5 21.5,-11.5 22.5,-11.5 -22.5,-11 -21.5,-11 -20.5,-11 -19.5,-11 -18.5,-11 -17.5,-11 -16.5,-11 17,-11 18,-11 19,-11 20,-11 21,-11 22,-11 -22,-10.5 -21,-10.5 -20,-10.5 -19,-10.5 -18,-10.5 -17,-10.5 16.5,-10.5 17.5,-10.5 18.5,-10.5 19.5,-10.5 20.5,-10.5 21.5,-10.5 22.5,-10.5 -22.5,-10 -21.5,-10 -20.5,-10 -19.5,-10 -18.5,-10 -17.5,-10 -16.5,-10 17,-10 18,-10 19,-10 20,-10 21,-10 22,-10 -22,-9.5 -21,-9.5 -20,-9.5 -19,-9.5 -18,-9.5 16.5,-9.5 18.5,-9.5 19.5,-9.5 20.5,-9.5 21.5,-9.5 22.5,-9.5 -22.5,-9 -21.5,-9 -20.5,-9 -19.5,-9 -18.5,-9 19,-9 20,-9 21,-9 22,-9 -22,-8.5 -21,-8.5 -20,-8.5 -19,-8.5 18.5,-8.5 19.5,-8.5 20.5,-8.5 21.5,-8.5 22.5,-8.5 -22.5,-8 -21.5,-8 -20.5,-8 -19.5,-8 -18.5,-8 18,-8 19,-8 20,-8 21,-8 22,-8 -22,-7.5 -21,-7.5 -20,-7.5 -19,-7.5 -18,-7.5 17.5,-7.5 18.5,-7.5 19.5,-7.5 20.5,-7.5 21.5,-7.5 22.5,-7.5 -22.5,-7 -21.5,-7 -20.5,-7 -19.5,-7 -18.5,-7 -17.5,-7 18,-7 19,-7 20,-7 21,-7 22,-7 -22,7 -21,7 -20,7 -19,7 -18,7 18.5,7 19.5,7 20.5,7 21.5,7 22.5,7 -22.5,7.5 -21.5,7.5 -20.5,7.5 -19.5,7.5 -18.5,7.5 -17.5,7.5 -12.5,7.5 -11.5,7.5 -10.5,7.5 19,7.5 20,7.5 21,7.5 22,7.5 -22,8 -21,8 -20,8 -19,8 -18,8 -13,8 -12,8 -11,8 18.5,8 19.5,8 20.5,8 21.5,8 22.5,8 -22.5,8.5 -21.5,8.5 -20.5,8.5 -19.5,8.5 -18.5,8.5 -15.5,8.5 -14.5,8.5 -13.5,8.5 -12.5,8.5 -11.5,8.5 -10.5,8.5 19,8.5 20,8.5 21,8.5 22,8.5 -22,9 -21,9 -20,9 -19,9 -18,9 -16,9 -15,9 -14,9 -13,9 -12,9 -11,9 18.5,9 19.5,9 20.5,9 21.5,9 22.5,9 -22.5,9.5 -21.5,9.5 -20.5,9.5 -19.5,9.5 -18.5,9.5 -16.5,9.5 -15.5,9.5 -14.5,9.5 -13.5,9.5 -12.5,9.5 -11.5,9.5 -10.5,9.5 19,9.5 20,9.5 21,9.5 22,9.5 -22,10 -21,10 -20,10 -19,10 -18,10 -17,10 -16,10 -15,10 -14,10 -13,10 -12,10 -11,10 18.5,10 19.5,10 20.5,10 21.5,10 22.5,10 -22.5,10.5 -21.5,10.5 -20.5,10.5 -19.5,10.5 -18.5,10.5 -17.5,10.5 -16.5,10.5 -15.5,10.5 -14.5,10.5 -13.5,10.5 -12.5,10.5 -11.5,10.5 -10.5,10.5 19,10.5 20,10.5 21,10.5 22,10.5 -22,11 -21,11 -20,11 -19,11 -18,11 -17,11 -16,11 -15,11 -14,11 -13,11 -12,11 -11,11 18.5,11 19.5,11 20.5,11 21.5,11 22.5,11 -22.5,11.5 -21.5,11.5 -20.5,11.5 -19.5,11.5 -18.5,11.5 -17.5,11.5 -16.5,11.5 -15.5,11.5 -14.5,11.5 -13.5,11.5 -12.5,11.5 -11.5,11.5 -10.5,11.5

## Polygon pours and split planes (outlines as drawn)
GND on Bottom Layer "GND_BOTTON" (solid, remove dead copper, pour order 1): -13.5,-12 -13.5,-8 -15.5,-8 -17.5,-6 -17.5,6 -16,7.5 -14,7.5 -13,6.5 -8,6.5 -7,7.5 16,7.5 17.5,6 17.5,-6 15.5,-8 12,-8 12,-12
V_BAT on Bottom Layer "V_BAT_BOTTON" (solid, remove dead copper, pour order 0): -14,-12 -14,-8 -16,-8 -18,-6 -18,6 -16,8 -14,8 -13,7 -8,7 -7,8 16,8 18,6 18,-6 16,-8 12.5,-8 12.5,-12 26,-12 26,12 -26,12 -26,-12
GND on Top Layer "GND_TOP" (solid, remove dead copper, pour order 2): -5.5,12 -5.5,9 -8,6.5 -13,6.5 -14,7.5 -16,7.5 -18,5.5 -18,-5.5 -15.5,-8 -15.5,-12 15.5,-12 15.5,-8 18,-5.5 18,6 16,8 16,12

## Other copper
Top Layer:
  region net NetJ2_2: -29,-12 -29,-10 -26.5,-10 -26.5,-5.3 -23,-5.3 -23,-0.3 -34.5,-0.3 -34.5,-7.5 ccw(c-30,-7.5) -30,-12
  region net NetJ2_1: -30,12 ccw(c-30,7.5) -34.5,7.5 -34.5,0.3 -23,0.3 -23,5.3 -26.5,5.3 -27.8,5.3 -28.2,5.7 -28.2,7.5 -27.8,7.9 -26.5,7.9 -26.5,12
  region net NetJ4_1: 30,-12 ccw(c30,-7.5) 34.5,-7.5 34.5,-0.3 23,-0.3 23,-5.3 26.5,-5.3 27.8,-5.3 28.2,-5.7 28.2,-7.5 27.8,-7.9 26.5,-7.9 26.5,-12
  region net NetJ4_2: 34.5,7.5 ccw(c30,7.5) 30,12 29,12 29,10 26.5,10 26.5,5.3 23,5.3 23,0.3 34.5,0.3
  region net V_BAT: 26,-6.5 26,-12 16,-12 16,-8 17.5,-6.5
  region net V_BAT: 16.5,9.5 18.5,11.5 26,11.5 26,6.5 18,6.5 16.5,8
  region net NetM2_S: -18.5,-5.3 -22.5,-5.3 -22.5,-2 -20.7,-2 -20.7,0.7 -22.5,0.7 -22.5,4 -18.5,4
  region net V_BAT: -16,8 -14,8 -13,7 -8.5,7 -8.5,12 -26,12 -26,6.5 -17.5,6.5
  region net V_BAT: -26,-6.5 -26,-11.5 -16,-11.5 -16,-8 -17.5,-6.5
  region net NetM6_S: 18.5,5.3 22.5,5.3 22.5,2 20.7,2 20.7,-0.7 22.5,-0.7 22.5,-4 18.5,-4
Bottom Layer:
  region net NetJ2_2: -30,-12 cw(c-30,-7.5) -34.5,-7.5 -34.5,-0.3 -26.5,-0.3 -26.5,-5.3 -26.5,-7.9 -26.5,-12
  region net NetJ2_1: -30,12 ccw(c-30,7.5) -34.5,7.5 -34.5,0.3 -26.5,0.3 -26.5,5.3 -26.5,7.9 -26.5,12
  region net NetJ4_2: 30,12 cw(c30,7.5) 34.5,7.5 34.5,0.3 26.5,0.3 26.5,5.3 26.5,7.9 26.5,12
  region net NetJ4_1: 30,-12 ccw(c30,-7.5) 34.5,-7.5 34.5,-0.3 26.5,-0.3 26.5,-5.3 26.5,-7.9 26.5,-12

## Silkscreen, mask and mechanical layers (free items; w line width, h text height)
Top Overlay:
  lines w0.5: -7,7 -7,12
  lines w1: -11,5 -8,5 ; -9.5,3.5 -9.5,6.5 ; -6,5 -3,5
  text "2S-4S" at -9.245,1.5 h1
Mechanical 1:
  the board outline again, w0.1

## Text inside footprints (layer, text, board x,y; h text height)
C7: Top Overlay "R 8mm" at -17.136,10.694 h0.4; Top Overlay "3.5mm" at -17.415,7.43 h0.4 r315
C8: Top Overlay "R 8mm" at -19.194,-8.636 h0.4 r90; Top Overlay "3.5mm" at -15.93,-8.915 h0.4 r45
C9: Top Overlay "R 8mm" at 19.194,8.636 h0.4 r270; Top Overlay "3.5mm" at 15.93,8.915 h0.4 r225
C10: Top Overlay "R 8mm" at 17.136,-10.694 h0.4 r180; Top Overlay "3.5mm" at 17.415,-7.43 h0.4 r135